# Altium PCB Bing Bong.PcbDoc
Units mil, origin at the board's own origin, x right, y up, seen from the top; angles counter-clockwise.
Board outline 6000 x 4000 mil, 2 copper layers (Top Layer, Bottom Layer); 143 components, 92 nets, 472 pads, 2 vias.
Unrouted connection lines stored in the file: 332.
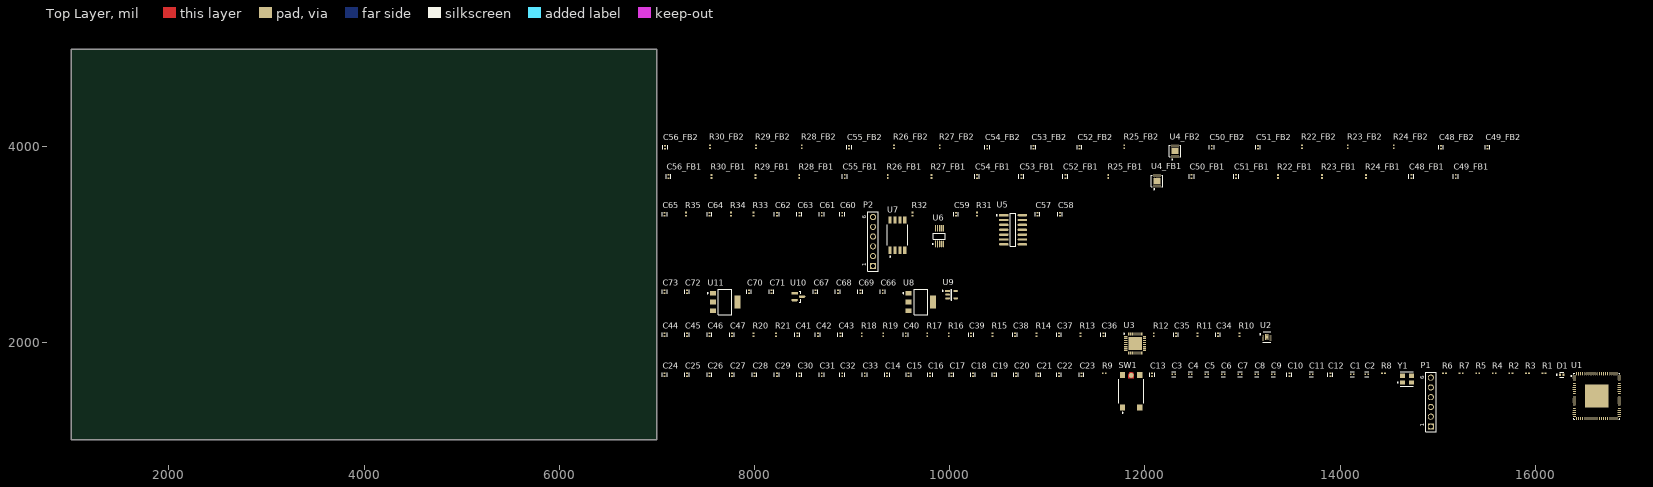
[diagram p0: Top Layer view]
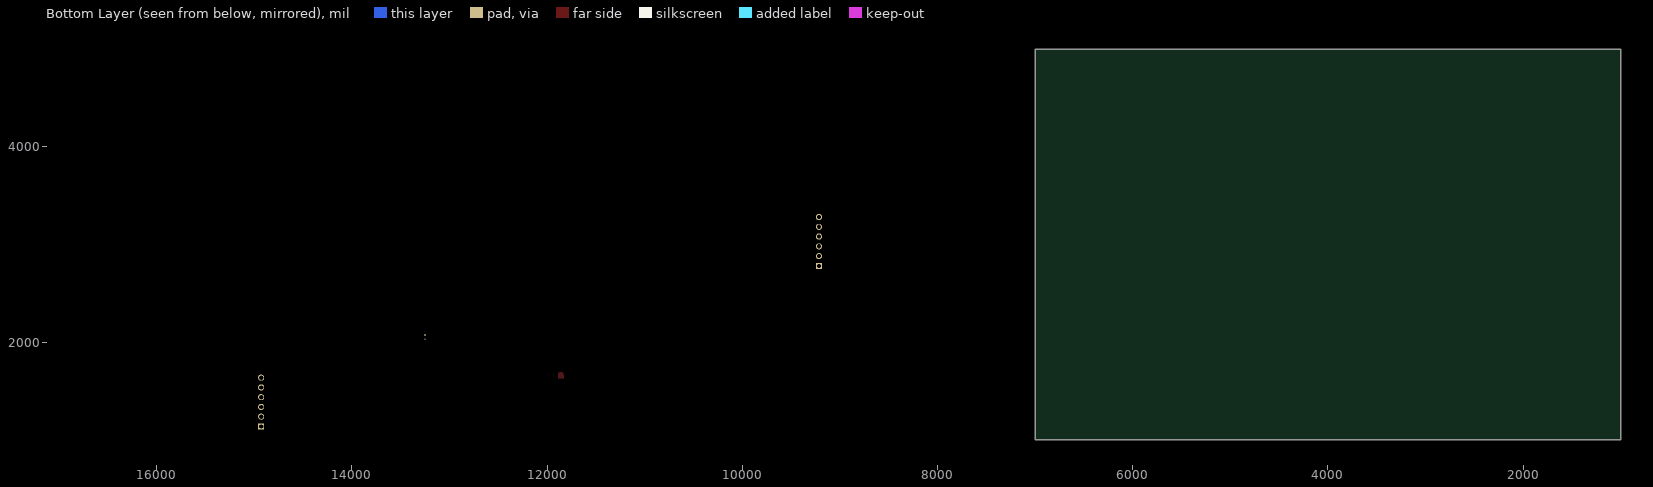
[diagram p1: Bottom Layer view, seen from below]

## Layer stack, top to bottom
Top Solder: solder mask 0.4, Solder Resist, Dk 3.5
Top Layer: signal copper 1.4
Dielectric 1: dielectric 12.6, FR-4, Dk 4.8
Bottom Layer: signal copper 1.4
Bottom Solder: solder mask 0.4, Solder Resist, Dk 3.5

## Board outline
1000,1000 7000,1000 7000,5000 1000,5000

## Design rules (kind name [scope] priority, off if disabled: settings)
Clearance [All] p1: gap=10 ignorepadtopadclearanceinfootprint=FALSE except(0: Arc-Hole Track-Hole SMDPad-Hole THPad-Hole Via-Hole Fill-Hole Poly-Hole Region-Hole Text-Hole)
PolygonConnect [All] p1: connectstyle=Relief reliefconductorwidth=10 reliefentries=4 polygonreliefangle="90 Angle" airgapwidth=10
RoomDefinition Designator_5 [InComponentClass('Designator')] p1: confinementstyle=ConfineIn formatcopy=TRUE lockcomponents=FALSE outline 0,0 2000,0 2000,1000 0,1000
RoomDefinition Designator_4 [InComponentClass('Designator')] p2: confinementstyle=ConfineIn formatcopy=TRUE lockcomponents=FALSE outline 0,0 2000,0 2000,1000 0,1000
RoomDefinition Designator [InComponentClass('Designator')] p3: confinementstyle=ConfineIn formatcopy=TRUE lockcomponents=FALSE outline 0,0 2000,0 2000,1000 0,1000
RoomDefinition Designator [InComponentClass('Designator')] p4: confinementstyle=ConfineIn formatcopy=TRUE lockcomponents=FALSE outline 0,0 2000,0 2000,1000 0,1000
RoomDefinition FB2 [InComponentClass('FB2')] p5: confinementstyle=ConfineIn formatcopy=TRUE lockcomponents=FALSE outline 7045,3855 15910,3855 15910,4150 7045,4150
RoomDefinition FB1 [InComponentClass('FB1')] p6: confinementstyle=ConfineIn formatcopy=TRUE lockcomponents=FALSE outline 7080,3550.75 15565,3550.75 15565,3845.75 7080,3845.75
RoutingVias [All] p1: holewidth=28 width=50 viastyle="Through Hole" minholewidth=28 minwidth=50 maxholewidth=28 maxwidth=50
SolderMaskExpansion [All] p1: expansion=4 istentingtop=FALSE
Width [All] p1: maxlimit=10 minlimit=10 preferedwidth=10
30 further rules are at their usual default settings.

## Classes and differential pairs
channel class "Filters n Buffers": FB1 FB2
net class "IN- [1..2]": "IN- 1" "IN- 2"
net class "Au In [1..2]": "Au In 1" "Au In 2"
component class FB2: C48_FB2 C49_FB2 C50_FB2 C51_FB2 C52_FB2 C53_FB2 C54_FB2 C55_FB2 C56_FB2 R22_FB2 R23_FB2 R24_FB2 R25_FB2 R26_FB2 R27_FB2 R28_FB2 R29_FB2 R30_FB2 U4_FB2
component class FB1: C48_FB1 C49_FB1 C50_FB1 C51_FB1 C52_FB1 C53_FB1 C54_FB1 C55_FB1 C56_FB1 R22_FB1 R23_FB1 R24_FB1 R25_FB1 R26_FB1 R27_FB1 R28_FB1 R29_FB1 R30_FB1 U4_FB1
component class Designator: C57 C58 C59 C60 C61 C62 C63 C64 C65 P2 R31 R32 R33 R34 R35 U5 U6 U7

## Components (designator, comment, footprint, x,y, rotation, side; value= is the part's Value field where it differs from the comment)
C1 "18pF" FP-GRM15-MFG 14125,1670 r0 top value=0.10μF
C2 "18pF" FP-GRM15-MFG 14275,1670 r0 top value=0.10μF
C3 "1uF" FP-GRM15-MFG 12295,1670 r0 top value=0.10μF
C4 "1uF" FP-GRM15-MFG 12465,1670 r0 top value=0.10μF
C5 "1uF" FP-GRM15-MFG 12635,1670 r0 top value=0.10μF
C6 "1uF" FP-GRM15-MFG 12805,1670 r0 top value=0.10μF
C7 "1uF" FP-GRM15-MFG 12975,1670 r0 top value=0.10μF
C8 "1uF" FP-GRM15-MFG 13145,1670 r0 top value=0.10μF
C9 "1uF" FP-GRM15-MFG 13315,1670 r0 top value=0.10μF
C10 "1uF" FP-GRM15-MFG 13480,1665 r90 top value=0.10μF
C11 "1uF" FP-GRM15-MFG 13705,1670 r0 top value=0.10μF
C12 "1uF" FP-GRM15-MFG 13900,1665 r90 top value=0.10μF
C13 "47pF" FP-GRM15-MFG 12075,1665 r90 top value=0.10μF
C14 "0.1uF" FP-GRM15-MFG 9360,1665 r90 top value=0.10μF
C15 "0.1uF" FP-GRM15-MFG 9580,1665 r90 top value=0.10μF
C16 "0.1uF" FP-GRM15-MFG 9800,1665 r90 top value=0.10μF
C17 "0.1uF" FP-GRM15-MFG 10020,1665 r90 top value=0.10μF
C18 "0.1uF" FP-GRM15-MFG 10240,1665 r90 top value=0.10μF
C19 "0.1uF" FP-GRM15-MFG 10460,1665 r90 top value=0.10μF
C20 "0.1uF" FP-GRM15-MFG 10680,1665 r90 top value=0.10μF
C21 "0.1uF" FP-GRM15-MFG 10910,1665 r90 top value=0.10μF
C22 "0.1uF" FP-GRM15-MFG 11120,1665 r90 top value=0.10μF
C23 "0.1uF" FP-GRM15-MFG 11350,1665 r90 top value=0.10μF
C24 "0.1uF" FP-GRM15-MFG 7080,1665 r90 top value=0.10μF
C25 "0.1uF" FP-GRM15-MFG 7310,1665 r90 top value=0.10μF
C26 "0.1uF" FP-GRM15-MFG 7540,1665 r90 top value=0.10μF
C27 "0.1uF" FP-GRM15-MFG 7770,1665 r90 top value=0.10μF
C28 "0.1uF" FP-GRM15-MFG 8000,1665 r90 top value=0.10μF
C29 "1uF" FP-GRM15-MFG 8230,1665 r90 top value=0.10μF
C30 "1uF" FP-GRM15-MFG 8460,1665 r90 top value=0.10μF
C31 "1uF" FP-GRM15-MFG 8690,1665 r90 top value=0.10μF
C32 "1uF" FP-GRM15-MFG 8900,1665 r90 top value=0.10μF
C33 "1uF" FP-GRM15-MFG 9130,1665 r90 top value=0.10μF
C34 "1nF" FP-GRM15-MFG 12750,2075 r90 top value=0.10μF
C35 "10uF" FP-GRM15-MFG 12320,2075 r90 top value=0.10μF
C36 "10uF" FP-GRM15-MFG 11575,2075 r90 top value=0.10μF
C37 "1nF" FP-GRM15-MFG 11120,2075 r90 top value=0.10μF
C38 "1nF" FP-GRM15-MFG 10670,2075 r90 top value=0.10μF
C39 "10uF" FP-GRM15-MFG 10220,2075 r90 top value=0.10μF
C40 "1nF" FP-GRM15-MFG 9550,2075 r90 top value=0.10μF
C41 "0.1uF" FP-GRM15-MFG 8440,2075 r90 top value=0.10μF
C42 "0.1uF" FP-GRM15-MFG 8650,2075 r90 top value=0.10μF
C43 "0.1uF" FP-GRM15-MFG 8880,2075 r90 top value=0.10μF
C44 "10uF" FP-GRM15-MFG 7080,2075 r90 top value=0.10μF
C45 "10uF" FP-GRM15-MFG 7310,2075 r90 top value=0.10μF
C46 "0.1uF" FP-GRM15-MFG 7540,2075 r90 top value=0.10μF
C47 "10uF" FP-GRM15-MFG 7770,2075 r90 top value=0.10μF
C48_FB1 "1uF" FP-GRM15-MFG 14730,3695.75 r90 top value=0.10μF (schematic designator C48)
C48_FB2 "1uF" FP-GRM15-MFG 15035,3995 r90 top value=0.10μF (schematic designator C48)
C49_FB1 "0.1uF" FP-GRM15-MFG 15185,3695.75 r90 top value=0.10μF (schematic designator C49)
C49_FB2 "0.1uF" FP-GRM15-MFG 15510,3995 r90 top value=0.10μF (schematic designator C49)
C50_FB1 "10uF" FP-GRM15-MFG 12480,3695.75 r90 top value=0.10μF (schematic designator C50)
C50_FB2 "10uF" FP-GRM15-MFG 12685,3995 r90 top value=0.10μF (schematic designator C50)
C51_FB1 "DNP!" FP-GRM15-MFG 12935,3695.75 r90 top value=0.10μF (schematic designator C51)
C51_FB2 "DNP!" FP-GRM15-MFG 13160,3995 r90 top value=0.10μF (schematic designator C51)
C52_FB1 "1nF" FP-GRM15-MFG 11185,3695.75 r90 top value=0.10μF (schematic designator C52)
C52_FB2 "1nF" FP-GRM15-MFG 11330,3995 r90 top value=0.10μF (schematic designator C52)
C53_FB1 "6.8nF" FP-GRM15-MFG 10735,3695.75 r90 top value=0.10μF (schematic designator C53)
C53_FB2 "6.8nF" FP-GRM15-MFG 10860,3995 r90 top value=0.10μF (schematic designator C53)
C54_FB1 "10uF" FP-GRM15-MFG 10280,3695.75 r90 top value=0.10μF (schematic designator C54)
C54_FB2 "10uF" FP-GRM15-MFG 10385,3995 r90 top value=0.10μF (schematic designator C54)
C55_FB1 "1nF" FP-GRM15-MFG 8925,3695.75 r90 top value=0.10μF (schematic designator C55)
C55_FB2 "1nF" FP-GRM15-MFG 8970,3995 r90 top value=0.10μF (schematic designator C55)
C56_FB1 "DNP!" FP-GRM15-MFG 7120,3695.75 r90 top value=0.10μF (schematic designator C56)
C56_FB2 "DNP!" FP-GRM15-MFG 7085,3995 r90 top value=0.10μF (schematic designator C56)
C57 "0.1uF" FP-GRM15-MFG 10900,3310 r90 top value=0.10μF
C58 "1uF" FP-GRM15-MFG 11130,3310 r90 top value=0.10μF
C59 "0.1uF" FP-GRM15-MFG 10065,3310 r90 top value=0.10μF
C60 "0.1uF" FP-GRM15-MFG 8900,3310 r90 top value=0.10μF
C61 "47pF" FP-GRM15-MFG 8690,3310 r90 top value=0.10μF
C62 "0.1uF" FP-GRM15-MFG 8230,3310 r90 top value=0.10μF
C63 "1uF" FP-GRM15-MFG 8460,3310 r90 top value=0.10μF
C64 "0.1uF" FP-GRM15-MFG 7540,3310 r90 top value=0.10μF
C65 "0.1uF" FP-GRM15-MFG 7080,3310 r90 top value=0.10μF
C66 "0.47uF" FP-GRM15-MFG 9315,2515 r90 top value=0.10μF
C67 "0.47uF" FP-GRM15-MFG 8625,2515 r90 top value=0.10μF
C68 "0.47uF" FP-GRM15-MFG 8855,2515 r90 top value=0.10μF
C69 "0.47uF" FP-GRM15-MFG 9085,2515 r90 top value=0.10μF
C70 "0.47uF" FP-GRM15-MFG 7945,2515 r90 top value=0.10μF
C71 "0.47uF" FP-GRM15-MFG 8175,2515 r90 top value=0.10μF
C72 "0.47uF" FP-GRM15-MFG 7310,2515 r90 top value=0.10μF
C73 "0.47uF" FP-GRM15-MFG 7080,2515 r90 top value=0.10μF
D1 "SML-P11UTT86" FP-SML-P11UTT86-MFG 16270,1665 r0 top
P1 "61300611121" 61300611121 14930,1385 r90 top
P2 "61300611121" 61300611121 9215,3030 r90 top
R1 "2K2" RESC1005X40X25LL05T05 16090,1680 r0 top
R2 "0R" RESC1005X40X25LL05T05 15750,1680 r0 top
R3 "DNP!" RESC1005X40X25LL05T05 15920,1680 r0 top
R4 "2K2" RESC1005X40X25LL05T05 15580,1680 r0 top
R5 "2K2" RESC1005X40X25LL05T05 15410,1680 r0 top
R6 "DNP!" RESC1005X40X25LL05T05 15070,1680 r0 top
R7 "0R" RESC1005X40X25LL05T05 15240,1680 r0 top
R8 "2K" RESC1005X40X25LL05T05 14445,1680 r0 top
R9 "10K" RESC1005X40X25LL05T05 11585,1680 r0 top
R10 "5K" RESC1005X40X25LL05T05 12970,2075 r90 top
R11 "10K" RESC1005X40X25LL05T05 12540,2075 r90 top
R12 "10K" RESC1005X40X25LL05T05 12090,2075 r90 top
R13 "5K" RESC1005X40X25LL05T05 11340,2075 r90 top
R14 "5K" RESC1005X40X25LL05T05 10890,2075 r90 top
R15 "10K" RESC1005X40X25LL05T05 10440,2075 r90 top
R16 "10K" RESC1005X40X25LL05T05 9990,2075 r90 top
R17 "5K" RESC1005X40X25LL05T05 9770,2075 r90 top
R18 "0R" RESC1005X40X25LL05T05 9100,2075 r90 top
R19 "0R" RESC1005X40X25LL05T05 9320,2075 r90 top
R20 "0R" RESC1005X40X25LL05T05 7990,2075 r90 top
R21 "0R" RESC1005X40X25LL05T05 8220,2075 r90 top
R22_FB1 "1K" RESC1005X40X25LL05T05 13365,3695.75 r90 top (schematic designator R22)
R22_FB2 "1K" RESC1005X40X25LL05T05 13610,4000 r90 top (schematic designator R22)
R23_FB1 "2K" RESC1005X40X25LL05T05 13815,3695.75 r90 top (schematic designator R23)
R23_FB2 "2K" RESC1005X40X25LL05T05 14080,4000 r90 top (schematic designator R23)
R24_FB1 "0R" RESC1005X40X25LL05T05 14265,3695.75 r90 top (schematic designator R24)
R24_FB2 "0R" RESC1005X40X25LL05T05 14550,4000 r90 top (schematic designator R24)
R25_FB1 "2K" RESC1005X40X25LL05T05 11625,3695.75 r90 top (schematic designator R25)
R25_FB2 "2K" RESC1005X40X25LL05T05 11790,4000 r90 top (schematic designator R25)
R26_FB1 "1K" RESC1005X40X25LL05T05 9365,3695.75 r90 top (schematic designator R26)
R26_FB2 "1K" RESC1005X40X25LL05T05 9430,4000 r90 top (schematic designator R26)
R27_FB1 "2K" RESC1005X40X25LL05T05 9815,3695.75 r90 top (schematic designator R27)
R27_FB2 "2K" RESC1005X40X25LL05T05 9900,4000 r90 top (schematic designator R27)
R28_FB1 "2K" RESC1005X40X25LL05T05 8460,3695.75 r90 top (schematic designator R28)
R28_FB2 "2K" RESC1005X40X25LL05T05 8485,4000 r90 top (schematic designator R28)
R29_FB1 "10K" RESC1005X40X25LL05T05 8010,3695.75 r90 top (schematic designator R29)
R29_FB2 "10K" RESC1005X40X25LL05T05 8015,4000 r90 top (schematic designator R29)
R30_FB1 "0R" RESC1005X40X25LL05T05 7560,3695.75 r90 top (schematic designator R30)
R30_FB2 "0R" RESC1005X40X25LL05T05 7545,4000 r90 top (schematic designator R30)
R31 "100R" RESC1005X40X25LL05T05 10280,3310 r90 top
R32 "100R" RESC1005X40X25LL05T05 9620,3310 r90 top
R33 "100R" RESC1005X40X25LL05T05 7990,3310 r90 top
R34 "10K" RESC1005X40X25LL05T05 7760,3310 r90 top
R35 "100R" RESC1005X40X25LL05T05 7300,3310 r90 top
SW1 "FSM1LP" FP-FSM1LP-MFG 11860,1495 r90 top
U1 "ADSP-BF706" FP-CP-88-8-IPC_C 16630,1445 r0 top
U2 "OPA2991IDSGR" FP-DSG0008A-MFG 13250,2050 r0 top
U3 "ADAU1761" LFCSP-32 11900,1985 r0 top
U4_FB1 "AD8137YCPZ-REEL7" FP-CP-8-13-IPC_C 12125,3650.75 r90 top (schematic designator U4)
U4_FB2 "AD8137YCPZ-REEL7" FP-CP-8-13-IPC_C 12310,3955 r90 top (schematic designator U4)
U5 "LM2902DR" FP-D0014A-IPC_A 10650,3150 r0 top
U6 "ADC084S021CIMM/NOPB" MUB10A_N 9895,3085 r90 top
U7 "W25Q32FVSSIG" FP-SS-MFG 9465,3095 r90 top
U8 "ZLDO1117QG33TA" FP-SOT223-MFG 9705,2410 r0 top
U9 "TLV73311PDBVT" FP-DBV0005A-IPC_C 10020,2485 r0 top
U10 "AP2120N-1.8TRG1" FP-SOT23-IPC_A 8450,2465 r0 top
U11 "ZLDO1117QG33TA" FP-SOT223-MFG 7700,2410 r0 top
Y1 "ABM8-25.000MHZ-B2-T" FP-ABM8-MFG 14685,1620 r0 top

## Footprints (in the part's own frame and the unit in brackets; to place one, negate y for a bottom-side part, rotate by r counter-clockwise, add the part's x,y. Pads: shape width x height; smd on the part's side, far side on the other; paste and mask are expansions set on the pad)
61300611121 [mm] "Pin Header, pitch 2.54 mm, THT, Vertical, single row, 6p"
  rect 1.6x1.6 hole 1.1: 1(-6.35,0)
  round 1.6 hole 1.1: 2(-3.81,0) 3(-1.27,0) 4(1.27,0) 5(3.81,0) 6(6.35,0)
  silkscreen extent -7.77,-1.35 7.77,1.35, body extent -7.62,-1.27 7.62,1.27, height 8.57
FP-ABM8-MFG [mm]
  rect 1.3x1.05 smd paste+0 mask+0: 1(-1.15,-0.875) 2(1.15,-0.875) 3(1.15,0.875) 4(-1.15,0.875)
  silkscreen extent -2.5,-1.88 1.7,1.88, body extent -1.9,-1.5 1.9,1.5, height 0.25
FP-CP-8-13-IPC_C [mm]
  rect 0.81x0.242 smd paste+0 mask+0: 1(-1.351,0.75)
  rrect100% 0.81x0.242 smd paste+0 mask+0: 2(-1.351,0.25) 3(-1.351,-0.25) 4(-1.351,-0.75) 5(1.351,-0.75) 6(1.351,-0.25) 7(1.351,0.25) 8(1.351,0.75)
  rect 1.55x1.84 smd paste-1000 mask+0: 9(0,0)
  silkscreen extent -2.28,-1.5 1.5,1.5, body extent -1.86,-1.6 1.86,1.6, height 0.25
FP-CP-88-8-IPC_C [mm]
  rect 0.81x0.222 smd paste+0 mask+0: 1(-5.851,5.25)
  rrect100% 0.81x0.222 smd paste+0 mask+0: 2(-5.851,4.75) 3(-5.851,4.25) 4(-5.851,3.75) 5(-5.851,3.25) 6(-5.851,2.75) 7(-5.851,2.25) 8(-5.851,1.75) 9(-5.851,1.25) 10(-5.851,0.75) 11(-5.851,0.25) 12(-5.851,-0.25) 13(-5.851,-0.75) 14(-5.851,-1.25) 15(-5.851,-1.75) 16(-5.851,-2.25) 17(-5.851,-2.75) 18(-5.851,-3.25) 19(-5.851,-3.75) 20(-5.851,-4.25) 21(-5.851,-4.75) 22(-5.851,-5.25) 45(5.851,-5.25) 46(5.851,-4.75) 47(5.851,-4.25) 48(5.851,-3.75) 49(5.851,-3.25) 50(5.851,-2.75) 51(5.851,-2.25) 52(5.851,-1.75) 53(5.851,-1.25) 54(5.851,-0.75) 55(5.851,-0.25) 56(5.851,0.25) 57(5.851,0.75) 58(5.851,1.25) 59(5.851,1.75) 60(5.851,2.25) 61(5.851,2.75) 62(5.851,3.25) 63(5.851,3.75) 64(5.851,4.25) 65(5.851,4.75) 66(5.851,5.25)
  rrect100% 0.222x0.81 smd paste+0 mask+0: 23(-5.25,-5.851) 24(-4.75,-5.851) 25(-4.25,-5.851) 26(-3.75,-5.851) 27(-3.25,-5.851) 28(-2.75,-5.851) 29(-2.25,-5.851) 30(-1.75,-5.851) 31(-1.25,-5.851) 32(-0.75,-5.851) 33(-0.25,-5.851) 34(0.25,-5.851) 35(0.75,-5.851) 36(1.25,-5.851) 37(1.75,-5.851) 38(2.25,-5.851) 39(2.75,-5.851) 40(3.25,-5.851) 41(3.75,-5.851) 42(4.25,-5.851) 43(4.75,-5.851) 44(5.25,-5.851) 67(5.25,5.851) 68(4.75,5.851) 69(4.25,5.851) 70(3.75,5.851) 71(3.25,5.851) 72(2.75,5.851) 73(2.25,5.851) 74(1.75,5.851) 75(1.25,5.851) 76(0.75,5.851) 77(0.25,5.851) 78(-0.25,5.851) 79(-0.75,5.851) 80(-1.25,5.851) 81(-1.75,5.851) 82(-2.25,5.851) 83(-2.75,5.851) 84(-3.25,5.851) 85(-3.75,5.851) 86(-4.25,5.851) 87(-4.75,5.851) 88(-5.25,5.851)
  rect 6x6 smd paste-1000 mask+0: 89(0,0)
  silkscreen extent -6.78,-6 6,6, body extent -6.36,-6.36 6.36,6.36, height 0.25
FP-D0014A-IPC_A [mil]
  rect 97.4x24.49 smd paste+0 mask+0: 1(-95.12,150)
  rrect100% 97.4x24.49 smd paste+0 mask+0: 2(-95.12,100) 3(-95.12,50) 4(-95.12,0) 5(-95.12,-50) 6(-95.12,-100) 7(-95.12,-150) 8(95.12,-150) 9(95.12,-100) 10(95.12,-50) 11(95.12,0) 12(95.12,50) 13(95.12,100) 14(95.12,150)
  silkscreen extent -172,-170 27,170, body extent -164,-190 164,190, height 10
FP-DBV0005A-IPC_C [mm]
  rect 1.205x0.532 smd paste+0 mask+0: 1(-1.05,0.95)
  rrect100% 1.205x0.532 smd paste+0 mask+0: 2(-1.05,0) 3(-1.05,-0.95) 4(1.05,-0.95) 5(1.05,0.95)
  silkscreen extent -2.45,-1.45 0.05,1.45, body extent -1.75,-1.55 1.75,1.55, height 0.25
FP-DSG0008A-MFG [mm]
  rrect40% 0.5x0.25 smd paste+0 mask+0: 1(-0.95,0.75) 2(-0.95,0.25) 3(-0.95,-0.25) 4(-0.95,-0.75) 5(0.95,-0.75) 6(0.95,-0.25) 7(0.95,0.25) 8(0.95,0.75)
  rrect11% 0.9x1.6 smd paste-1000 mask+0: 9(0,0)
  silkscreen extent -1.87,-1.39 1,1.4, body extent -1.3,-1.15 1.3,1.15, height 0.25
FP-FSM1LP-MFG [mm]
  rect 1.6x1.395 smd paste+0 mask+0: 1(-4.205,2.248) 2(4.205,2.248) 3(-4.205,-2.248) 4(4.205,-2.248)
  round 1.26 smd paste+0 mask+0: 5(4.139,0)
  Top Layer region: 3.405,0.7 4.307,0.7 4.574,0.647 4.801,0.496 4.952,0.269 5.005,0.002 5.005,0.002 5.005,-0.002 4.952,-0.269 4.801,-0.496 4.574,-0.647 4.307,-0.7 4.307,-0.7 3.405,-0.7
  silkscreen extent -5.72,-3.25 3.15,3.25, body extent -5.1,-3.35 5.11,3.35, height 0.25
FP-GRM15-MFG [mm]
  rect 0.4x0.5 smd paste+0 mask+0: 1(-0.4,0) 2(0.4,0)
  silkscreen extent -0.53,-0.63 0.53,0.63, body extent -0.7,-0.38 0.7,0.38, height 0.25
FP-SML-P11UTT86-MFG [mm]
  rect 0.5x0.6 smd paste+0 mask+0: 1(-0.45,0) 2(0.45,0)
  silkscreen extent -1.37,-0.67 0.53,0.67, body extent -0.8,-0.43 0.8,0.43, height 0.25
FP-SOT23-IPC_A [mm]
  rect 1.659x0.627 smd paste+0 mask+0: 1(-0.977,0.915)
  rrect100% 1.659x0.627 smd paste+0 mask+0: 2(-0.977,-0.915) 3(0.977,0)
  silkscreen extent 0.23,-1.45 0.65,1.45, body extent -2.31,-1.95 2.31,1.95, height 0.25
FP-SOT223-MFG [mm]
  rect 1.6x1.2 smd paste+0 mask+0: 1(-3.2,2.3) 2(-3.2,0) 3(-3.2,-2.3)
  rect 1.6x3.3 smd paste+0 mask+0: 4(3.2,0)
  silkscreen extent -4.67,-3.27 1.78,3.27, body extent -4.1,-3.37 4.1,3.37, height 0.25
FP-SS-MFG [mm]
  rect 1.9x0.8 smd paste-1000 mask+0: 1(-3.95,1.905) 2(-3.95,0.635) 3(-3.95,-0.635) 4(-3.95,-1.905) 5(3.95,-1.905) 6(3.95,-0.635) 7(3.95,0.635) 8(3.95,1.905)
  silkscreen extent -5.71,-2.69 2.69,2.69, body extent -5,-2.79 5,2.79, height 0.25
LFCSP-32 [mm] "SIGMADSP CODEC"
  rect 0.85x0.3 smd: 1(-2.45,1.75) 2(-2.45,1.25) 3(-2.45,0.75) 4(-2.45,0.25) 5(-2.45,-0.25) 6(-2.45,-0.75) 7(-2.45,-1.25) 8(-2.45,-1.75) 17(2.45,-1.75) 18(2.45,-1.25) 19(2.45,-0.75) 20(2.45,-0.25) 21(2.45,0.25) 22(2.45,0.75) 23(2.45,1.25) 24(2.45,1.75)
  rect 0.3x0.85 smd: 9(-1.75,-2.45) 10(-1.25,-2.45) 11(-0.75,-2.45) 12(-0.25,-2.45) 13(0.25,-2.45) 14(0.75,-2.45) 15(1.25,-2.45) 16(1.75,-2.45) 25(1.75,2.45) 26(1.25,2.45) 27(0.75,2.45) 28(0.25,2.45) 29(-0.25,2.45) 30(-0.75,2.45) 31(-1.25,2.45) 32(-1.75,2.45)
  rrect10% 3.5x3.5 smd: 33(0,0)
  silkscreen extent -3,2.38 -2.75,2.62, body extent -2.55,-2.55 2.55,2.55, height 1
MUB10A_N [mm] "TSSOP, 10-Leads, Body 3x3mm, Pitch 0.5mm, IPC Medium Density"
  oval 1.7x0.3 smd: 1(-2.05,1) 2(-2.05,0.5) 3(-2.05,0) 4(-2.05,-0.5) 5(-2.05,-1) 6(2.05,-1) 7(2.05,-0.5) 8(2.05,0) 9(2.05,0.5) 10(2.05,1)
  silkscreen extent -2.17,-1.55 0.8,1.82, body extent -1.55,-1.55 1.55,1.55, height 1.09
RESC1005X40X25LL05T05 [mm] "Chip Resistor, 2-Leads, Body 1.05x0.55mm, IPC High Density"
  rect 0.45x0.45 smd: 1(-0.4,0) 2(0.4,0)
  body extent -0.53,-0.28 0.53,0.28, height 0.4

## Part data
C1 C2 C3 C4 C5 C6 C7 C8 C9 C10 C11 C12 C13 C14 C15 C16 C17 C18 C19 C20 C21 C22 C23 C24 C25 C26 C27 C28 C29 C30 C31 C32 C33 C34 C35 C36 C37 C38 C39 C40 C41 C42 C43 C44 C45 C46 C47 C48_FB1 C48_FB2 C49_FB1 C49_FB2 C50_FB1 C50_FB2 C51_FB1 C51_FB2 C52_FB1 C52_FB2 C53_FB1 C53_FB2 C54_FB1 C54_FB2 C55_FB1 C55_FB2 C56_FB1 C56_FB2 C57 C58 C59 C60 C61 C62 C63 C64 C65 C66 C67 C68 C69 C70 C71 C72 C73: library part CMP-2100-03641-2, "CAP CER 0.1UF 16V X7R 0402", Capacitance=0.10μF, Manufacturer=Murata, Manufacturer Part Number=GRM155R71C104KA88D, Package=GRM15, Temperature="-55°C to +125°C", Temperature Characteristic=X7R, Temperature Range High=+125°C, Temperature Range Low=-55°C, Tolerance=10%, Voltage Rating=16Vdc, Category=Cap, ComponentLink2Description=Datasheet, ComponentLink2URL=https://search.murata.co.jp/Ceramy/image/img/A01X/G101/ENG/GRM155R71H471KA01-01A.pdf, Device Class L1="Passive Components", Device Class L2=Capacitors, Device Class L3="Ceramic Capacitors", Digikey Description="CAP CER 0.1UF 16V X7R 0402", Height=0.55mm, Ipc Land Pattern Name=CAPC10050X219, Lead Free=yes, Material=Ceramic, Mouser Description="0402 0.1 uF 16V ±10 % Tolerance X7R SMT Multilayer Ceramic Capacitor", Octopart=https://octopart.com/grm155r71c104ka88d-murata-196880, RoHS=TRUE, Standoff Height=0mm
D1: library part CMP-08952-000028-1, "LED RED CLEAR 1006 SMD", Case Code (Imperial)=0402, Case Code (Metric)=1005, Color=Red, Forward Current=20mA, Forward Voltage=1.8V, Lens Color=Colorless, Max Operating Temperature=85°C, Min Operating Temperature=-40°C, Package Quantity=1, Test Current=1mA, Case/Package=0402, Dominant Wavelength=621nm, Height=0.25mm, Illumination Color=Red, Lead Free="Lead Free", Length=1mm, Lens Style=Square, Lens Transparency=Clear, Luminous Intensity=5.5mcd, Mount="Surface Mount", Number of LEDs=1, Number of Pins=2, Packaging="Tape and Reel", Radiation Hardening=No, REACH SVHC="No SVHC", RoHS Compliant=Yes, Series=PicoLED™, Viewing Angle=150°, Wavelength=621nm, Width=0.6mm
P1 P2: library part CMP-1502-01070-1, "THT Vertical Pin Header WR-PHD, Pitch 2.54 mm, Single Row, 6 pins", Contact Resistance=20mOhm, Manufacturer="Wurth Elektronik", Operating Temperature=-40to105degC, Rated Current=3A, Withstanding Voltage=500VAC, Working Voltage=250VAC, Datasheet URL=https://katalog.we-online.de/em/datasheet/6130xx11121.pdf, Gender=Male, Manufacturer URL=http://www.we-online.de, Mounting Technology=THT, Orientation=Vertical, Package Reference=61300611121, Packaging=Bag, Part Number=61300611121, Pin Number=6, Pitch=2.54mm, Publisher=WurthElektronik, Row Number=Single
R1 R2 R3 R4 R5 R6 R7 R8 R9 R10 R11 R12 R13 R14 R15 R16 R17 R18 R19 R20 R21 R22_FB1 R22_FB2 R23_FB1 R23_FB2 R24_FB1 R24_FB2 R25_FB1 R25_FB2 R26_FB1 R26_FB2 R27_FB1 R27_FB2 R28_FB1 R28_FB2 R29_FB1 R29_FB2 R30_FB1 R30_FB2 R31 R32 R33 R34 R35: library part CMP-2000-07451-1, "Chip Resistor, 0 Ohm, 0.1 W, -55 to 155 degC, 0402 (1005 Metric), RoHS, Tape and Reel", Case Code (Imperial)=0402, Case Code (Metric)=1005, Manufacturer=Panasonic, Max Operating Temperature=155degC, Max Power Dissipation=100mW, Min Operating Temperature=-55degC, Package Description="2-Pin Surface Mount Device, Body 1 x 0.5 mm", Package Quantity=1, Package Reference=402, Resistance=0mOhm, Temperature Coefficient=600ppm/��C, Tolerance=5%, Voltage Rating=50V, Case/Package=0402, Composition=ThickFilm, Contact Plating=Tin, Datasheet URL=https://industrial.panasonic.com/cdbs/www-data/pdf/RDA0000/AOA0000C301.pdf, Datasheet Version=03/2015, Depth=0.5mm, Height=0.35mm, Lead Free=LeadFree, Length=1mm, Manufacturer URL=http://www.panasonic.com/, Military Standard=Not, Mount=SurfaceMount, Mounting Technology=SurfaceMount, Number of Terminations=2, Packaging=TapeandReel, Power Rating=100mW, Radiation Hardening=No, REACH SVHC=NoSVHC, RoHSCompliant=True, Termination=SMD/SMT, Voltage Rating (DC)=50V, Width=0.02inch
SW1: library part CMP-03402-000015-1, "SWITCH TACTILE SPST-NO 0.05A 24V", Actuator Color=Black, Contact Current Rating=50mA, Contact Resistance=100mR, Max Operating Temperature=85°C, Max Voltage Rating (DC)=12V, Min Operating Temperature=-35°C, Operating Force=1.57N, Package Quantity=2000, Actuator Length=0.01inch, Actuator Material=Polyphthalamide, Actuator Type=Standard, Contact Material="Copper Alloy", Contact Plating=Silver, Current Rating=50mA, Depth=8mm, Electrical Life=100000Cycles, ELV=Compliant, Illumination Type=Non-Illuminated, Lead Free="Lead Free", Length=6.19mm, Max Current Rating=50mA, Mechanical Life=100000Cycles, Mount="Surface Mount", Orientation=Straight, Packaging="Loose Piece", REACH SVHC="No SVHC", RoHS Compliant=Yes, Series=FSM1LP, Switch Function=Off-Mom, Switch Travel=0.25mm, Termination="Gull Wing", Throw Configuration=SPST, Type=Switch, Voltage Rating (DC)=12V
U1: library part CMP-09089-000022-1, "IC DSP LP 128KB L2SR 88LFCSP", Frequency=200MHz, Max Operating Temperature=85°C, Min Operating Temperature=-40°C, Interface=I2C, Lead Free="Contains Lead", Max Frequency=200MHz, Memory Size=512KB, Mount="Surface Mount", Number of Pins=88, Packaging=Tray, RAM Size=128KB, RoHS Compliant=Yes
U2: library part CMP-04895-000388-1, "IC OPAMP GP 2 CIRCUIT", RoHS Compliant=Yes
U3: "Interface - CODECs Low Power Codec w/Sigma DSP"
U4_FB1 U4_FB2: library part CMP-09116-000220-1, "IC OPAMP DIFF 1 CIRCUIT 8LFCSP", Case/Package="LFCSP EP", Input Bias Current=900nA, Input Offset Voltage (Vos)=2.7mV, Input Resistance=800kR, Max Dual Supply Voltage=6V, Max Operating Temperature=125°C, Max Supply Current=245uA, Max Supply Voltage=12V, Min Dual Supply Voltage=1.35V, Min Operating Temperature=-40°C, Min Supply Voltage=2.7V, Nominal Supply Current=3.2mA, Operating Supply Current=3.6mA, Output Current per Channel=20mA, Package Quantity=1, Power Supply Rejection Ratio (PSRR)=79dB, Voltage Gain=89dB, -3db Bandwidth=110MHz, Amplifier Type=DIFFERENTIAL, Bandwidth=110MHz, Common Mode Rejection Ratio=66dB, Gain Bandwidth Product=110MHz, Height=0.8mm, Lead Free="Contains Lead", Length=3.1mm, Mount="Surface Mount", Number of Amplifiers=1, Number of Bits=12, Number of Channels=1, Number of Circuits=1, Number of Elements=1, Number of Pins=8, Packaging="Tape and Reel", Radiation Hardening=No, REACH SVHC="No SVHC", RoHS Compliant=Yes, Series=-, Settling Time=100ns, Slew Rate=450V/µs, Supply Current=3.2mA, Width=3.1mm
U5: library part CMP-04895-000441-1, "IC OPAMP GP 4 CIRCUIT 14SOIC", Case/Package=SOIC, Dual Supply Voltage=9V, Input Bias Current=250nA, Input Offset Voltage (Vos)=7mV, Max Dual Supply Voltage=13V, Max Operating Temperature=125°C, Max Supply Voltage=26V, Min Dual Supply Voltage=1.5V, Min Operating Temperature=-40°C, Min Supply Voltage=3V, Nominal Supply Current=3mA, Operating Supply Current=1.4mA, Output Current=30mA, Output Current per Channel=60mA, Package Quantity=1, Power Supply Rejection Ratio (PSRR)=50dB, Voltage Gain=100dB, Bandwidth=1.2MHz, Common Mode Rejection Ratio=50dB, Contact Plating=Tin, Gain Bandwidth Product=1.2MHz, Height=1.58mm, Lead Free="Lead Free", Length=8.65mm, Mount="Surface Mount", Number of Amplifiers=4, Number of Channels=4, Number of Circuits=4, Number of Elements=4, Number of Pins=14, Operating Supply Voltage=13V, Packaging="Tape and Reel", Radiation Hardening=No, REACH SVHC="No SVHC", Slew Rate=0.5V/µs, Unity Gain Bandwidth Product=1.2MHz, Width=3.91mm
U6: library part CMP-0054-00454-2, "4 Channel, 50 kSPS to 200 kSPS, 8-Bit A/D Converter, 10-pin Mini SOIC, Pb-Free", Manufacturer="National Semiconductor", PackageTopMarking=ZXTT*X19C, PowerWise=Y, Code_JEDEC=MO-187-BA, ComponentLink1Description="ADC084S021 Datasheet", ComponentLink1URL=http://www.national.com/ds/AD/ADC084S021.pdf, ComponentLink2Description="ADC084S021 Web Page", ComponentLink2URL=http://www.national.com/pf/AD/ADC084S021.html, ComponentLink3Description="MUB10A Package Page", ComponentLink3URL=http://www.national.com/packaging/folders/mub10a.html, CompType="ADC IC", DatasheetVersion=Aug-2008, PackageDescription="Mini-SO, Molded, .118 x .118 x .034in Body, 10 Lead, .0197in Pitch", PackageReference=MUB10A, PackageVersion="revB, Jul-2003", PinCount=10, RevisionNote="Component URLs added", RoHS=Y
U7: library part CMP-2000-05006-2, "IC FLASH 32M SPI 104MHZ 8SOIC", Ambient Temperature Range High=+85°C, Ambient Temperature Range Low=-40°C, Frequency=104MHz, Manufacturer=Winbond, Max Supply Voltage=3.6V, Min Supply Voltage=2.7V, Nominal Supply Current=8-20mA, Package=SS, Temperature="-40°C to +85°C", Access Time=7ns, Automotive=No, Category=IC, ComponentLink2Description=Datasheet, ComponentLink2URL=https://www.winbond.com/resource-files/w25q32fv%20revj%2006032016.pdf, Device Class L1="Integrated Circuits (ICs)", Device Class L2=Memory, Device Class L3=Flash, Digikey Description="IC FLASH 32M SPI 104MHZ 8SOIC", Footprint Url=http://www.winbond.com/resource-files/an0000009%20spiflash%20pcb%20layout%20guideline%20v2.0%2009252017.pdf?__locale=en, Height=2.16mm, Interface=SPI,Other, Ipc Land Pattern Name=SOIC127P790X195-8, Lead Free=Yes, Manufacturer Part Number=W25Q32FVSSIG, Memory Size=32Mbits, Memory Type=FLASH, Obsolete Part=true, Octopart=https://octopart.com/w25q32fvssig-winbond-23896462, RoHS=TRUE, Standoff Height=0.05mm, Temperature Range High=+85°C, Temperature Range Low=-40°C
U8 U11: library part CMP-12756-000030-1, "IC REG LINEAR 3.3V 1A SOT223-3", Case/Package=SOT-223, Dropout Voltage=1.11V, Max Input Voltage=18V, Max Operating Temperature=125°C, Max Output Current=1A, Max Power Dissipation=15W, Min Current Limit=1.1A, Min Input Voltage=2.7V, Min Operating Temperature=-40°C, Min Output Voltage=3.3V, Output Voltage Accuracy=2%, Package Quantity=1000, Quiescent Current=10mA, Accuracy=2%, Height=1.7mm, Lead Free="Lead Free", Length=6.7mm, Mount="Surface Mount", Nominal Output Voltage=3.3V, Number of Outputs=1, Number of Pins=3, Number of Regulators=1, Output Current=1A, Output Type=Fixed, Output Voltage=3.3V, Packaging="Tape and Reel", Polarity=Positive, Power Dissipation=15W, Radiation Hardening=No, REACH SVHC="No SVHC", Reference Voltage=3.3V, Tolerance=2%, Weight=0.000282oz, Width=3.7mm
U9: library part CMP-04917-000285-1, "IC REG LINEAR 1.1V 300MA SOT23-5", Case/Package=SOT-23-5, Dropout Voltage=460mV, Max Input Voltage=5.5V, Max Operating Temperature=125°C, Max Output Current=300mA, Min Current Limit=360mA, Min Input Voltage=1.4V, Min Operating Temperature=-40°C, Nominal Output Voltage=1.1V, Operating Supply Current=34uA, Package Quantity=250, Power Supply Rejection Ratio (PSRR)=68dB, Quiescent Current=60uA, Accuracy=1%, Lead Free="Lead Free", Mount="Surface Mount", Number of Outputs=1, Number of Pins=5, Number of Regulators=1, Output Current=300mA, Output Type=Fixed, Output Voltage=1.1V, Packaging="Tape and Reel", Polarity=Positive, REACH SVHC="No SVHC", RoHS Compliant=Yes, Weight=0.000557oz
U10: library part CMP-12756-000031-1, "IC REG LINEAR 1.8V 150MA SOT23", Case/Package=SOT-23, Dropout Voltage=300mV, Max Input Voltage=6V, Max Operating Temperature=85°C, Max Output Current=150mA, Min Input Voltage=2V, Min Operating Temperature=-40°C, Operating Supply Current=25uA, Output Voltage=1.8V, Package Quantity=3000, Power Supply Rejection Ratio (PSRR)=65dB, Quiescent Current=50uA, Accuracy=2%, Height=1.1mm, Lead Free="Lead Free", Length=3mm, Mount="Surface Mount", Number of Outputs=1, Number of Pins=3, Number of Regulators=1, Output Current=150mA, Output Type=Fixed, Packaging="Tape and Reel", Polarity=Positive, Weight=0.000282oz, Width=1.4mm
Y1: library part CMP-27762-013668-1, "Crystal 25MHz ±20ppm 18pF SMD-4 3.2mm x 2.5mm", Case/Package=CSMD, ESR (Equivalent Series Resistance)=50R, Frequency=25MHz, Frequency Stability=50ppm, Frequency Tolerance=20ppm, Load Capacitance=18pF, Max Operating Temperature=70°C, Min Operating Temperature=-20°C, Operating Frequency="25 MHz", Package Quantity=1000, Resistor Type=Ceramic, Depth=2.5mm, Height=0.031inch, Lead Free="Lead Free", Length=3.2mm, Mount="Surface Mount", Number of Pins=4, Packaging="Tape and Reel", Radiation Hardening=No, REACH SVHC="No SVHC", Series=ABM8, Series Resistance=50R, Termination=SMD/SMT, Tolerance=20ppm, Width=0.098inch

## Via types
v1: diameter 19.68, hole 7.87, Top Layer to Bottom Layer, 2 vias

## Nets (pads, with @x,y where several pads share a name; then routed paths per layer and width w, separated by ;. In a path a pad name is that pad's centre, name@x,y a point inside that pad or via, vN(x,y) a via of type N, cw(c..) or ccw(c..) an arc to the next point about the centre after c; other vN are vias at no path point)
1V1: C24.2 C25.2 C26.2 C27.2 C28.2 C29.2 C30.2 C31.2 C32.2 C33.2 C69.2 U1.14 U1.30 U1.51 U1.61 U1.81 U9.5
1V8: C61.2 C71.2 U7.8 U10.2
3V3_FB1: C1.1 C2.1 C3.1 C4.1 C5.1 C6.1 C7.1 C8.1 C9.1 C10.1 C11.1 C12.1 C13.1 C14.1 C15.1 C16.1 C17.1 C18.1 C19.1 C20.1 C21.1 C22.1 C23.1 C24.1 C25.1 C26.1 C27.1 C28.1 C29.1 C30.1 C31.1 C32.1 C33.1 C36.1 C41.1 C42.1 C42.2 C43.1 C44.1 C45.1 C45.2 C46.1 C46.2 C47.1 C48_FB1.1 C48_FB1.2 C48_FB2.1 C48_FB2.2 C49_FB1.1 C49_FB1.2 C49_FB2.1 C49_FB2.2 C50_FB1.2 C50_FB2.2 C51_FB1.1 C51_FB2.1 C56_FB1.1 C56_FB2.1 C57.1 C57.2 C58.1 C58.2 C59.1 C60.1 C61.1 C62.1 C63.1 C64.1 C65.1 C66.1 C67.1 C68.1 C69.1 C70.1 C71.1 C72.1 C72.2 C73.1 P2.5 P2.6 R1.1 R6.1 R7.1 R20.1 R21.1 R29_FB1.2 R29_FB2.2 R34.1 SW1.3 SW1.4 SW1.5 U1.76 U1.89 U2.4 U2.8 U2.9 U3.8 U3.9 U3.22 U3.23 U3.25 U4_FB1.3 U4_FB1.6 U4_FB1.7 U4_FB1.9 U4_FB2.3 U4_FB2.6 U4_FB2.7 U4_FB2.9 U5.4 U5.11 U6.3 U7.4 U8.1 U9.2 U10.1 U11.1 U11.2 U11.4 Y1.2 Y1.4
  other v1: 13250,2028.35 13250,2071.65
A0: R18.1 R20.2 U3.3
A1: R19.1 R21.2 U3.30
"ADC CS": U1.75 U6.1
"Au In1": C54_FB1.1 R29_FB1.1
"Au In2": C54_FB2.1 R29_FB2.1
CM: C34.1 C36.2 C38.1 R10.1 R14.1 U3.7 U4_FB1.2 U4_FB2.2
D3V3: C3.2 C4.2 C5.2 C6.2 C7.2 C8.2 C9.2 C10.2 C11.2 C12.2 C14.2 C15.2 C16.2 C17.2 C18.2 C19.2 C20.2 C21.2 C22.2 C23.2 C41.2 C44.2 C62.2 C63.2 C66.2 C68.2 C70.2 R2.2 R3.2 R4.2 R5.2 R9.2 R18.2 R19.2 U1.4 U1.11 U1.17 U1.22 U1.26 U1.36 U1.41 U1.49 U1.50 U1.55 U1.62 U1.72 U1.82 U3.1 U6.2 U8.2 U8.4 U9.1 U10.3
DVDDOUT: C43.2 C47.2 U3.24
"F CS": U1.23 U7.1
HOLD: U1.24 U7.7
IN+1: C56_FB1.2 R30_FB1.2
IN+2: C56_FB2.2 R30_FB2.2
"IN+ 1": U3.10
"IN+ 2": U3.12
IN-1: C51_FB1.2 R24_FB1.2
IN-2: C51_FB2.2 R24_FB2.2
"IN- 1": U3.11
"IN- 2": U3.13
MCLK: U1.12 U3.2
MISO: U1.28 U7.2
"MISO 1": U6.9
MOSI: U1.27 U7.5
"MOSI 1": U1.78 U6.8
NetC1_2: C1.2 R8.1 Y1.1
NetC13_2: C13.2 U1.43 U3.29
NetC34_2: C34.2 R10.2 R11.1 U2.3
NetC35_1: C35.1
NetC35_2: C35.2 C37.1 R13.2 U2.1
NetC37_2: C37.2 R12.1 R13.1 U2.2
NetC38_2: C38.2 R14.2 R15.1 U2.5
NetC39_1: C39.1
NetC39_2: C39.2 C40.1 R17.2 U2.7
NetC40_2: C40.2 R16.1 R17.1 U2.6
NetC50_FB1_1: C50_FB1.1 R22_FB1.1
NetC50_FB2_1: C50_FB2.1 R22_FB2.1
NetC52_FB1_1: C52_FB1.1 C53_FB1.2 R25_FB1.1 U4_FB1.8
NetC52_FB1_2: C52_FB1.2 R23_FB1.2 R24_FB1.1 U4_FB1.5
NetC52_FB2_1: C52_FB2.1 C53_FB2.2 R25_FB2.1 U4_FB2.8
NetC52_FB2_2: C52_FB2.2 R23_FB2.2 R24_FB2.1 U4_FB2.5
NetC53_FB1_1: C53_FB1.1 R26_FB1.2 R27_FB1.1 R28_FB1.2
NetC53_FB2_1: C53_FB2.1 R26_FB2.2 R27_FB2.1 R28_FB2.2
NetC54_FB1_2: C54_FB1.2 R26_FB1.1
NetC54_FB2_2: C54_FB2.2 R26_FB2.1
NetC55_FB1_1: C55_FB1.1 R28_FB1.1 R30_FB1.1 U4_FB1.4
NetC55_FB1_2: C55_FB1.2 R27_FB1.2 U4_FB1.1
NetC55_FB2_1: C55_FB2.1 R28_FB2.1 R30_FB2.1 U4_FB2.4
NetC55_FB2_2: C55_FB2.2 R27_FB2.2 U4_FB2.1
NetC59_2: C59.2 R31.1 U6.7
NetC60_2: C60.2 R32.1 U6.6
NetC64_2: C64.2 R33.1 U6.5
NetC65_2: C65.2 R35.1 U6.4
NetD1_1: D1.1 R1.2
NetD1_2: D1.2 U1.65
NetP1_1: P1.1 U1.10
NetP1_2: P1.2 U1.9
NetP1_3: P1.3 U1.8
NetP1_4: P1.4 U1.7
NetP1_5: P1.5 U1.6
NetP1_6: P1.6 U1.5
NetP2_1: P2.1 U5.3
NetP2_2: P2.2 U5.5
NetP2_3: P2.3 U5.10
NetP2_4: P2.4 U5.12
NetR2_1: R2.1 R6.2 U1.67
NetR3_1: R3.1 R7.2 U1.66
NetR4_1: R4.1 U1.19 U3.32
NetR5_1: R5.1 U1.18 U3.31
NetR22_FB1_2: R22_FB1.2 R23_FB1.1 R25_FB1.2
NetR22_FB2_2: R22_FB2.2 R23_FB2.1 R25_FB2.2
NetR31_2: R31.2 U5.1 U5.2
NetR32_2: R32.2 U5.6 U5.7
NetR33_2: R33.2 U5.8 U5.9
NetR35_2: R35.2 U5.13 U5.14
NetU1_15: U1.15 U9.3
NetU1_42: U1.42 U3.27
NetU1_44: U1.44 U3.26
NetU1_45: U1.45 U3.28
NetU1_80: U1.80
"OUT+ 1": R11.2 U3.18
"OUT+ 2": R15.2 U3.15
"OUT- 1": R12.2 U3.17
"OUT- 2": R16.2 U3.16
RST: R9.1 SW1.1 SW1.2 U1.68
"SCLK 1": U1.88 U6.10
"SPI CLK": R34.2 U1.29 U7.6
SYS_CLKIN: C2.2 U1.57 Y1.3
SYS_XTAL: R8.2 U1.56
VCC: C67.2 C73.2 U8.3 U11.3
WP: U1.25 U7.3
pads on no net: U1.1 U1.2 U1.3 U1.13 U1.16 U1.20 U1.21 U1.31 U1.32 U1.33 U1.34 U1.35 U1.37 U1.38 U1.39 U1.40 U1.46 U1.47 U1.48 U1.52 U1.53 U1.54 U1.58 U1.59 U1.60 U1.63 U1.64 U1.69 U1.70 U1.71 U1.73 U1.74 U1.77 U1.79 U1.83 U1.84 U1.85 U1.86 U1.87 U3.4 U3.5 U3.6 U3.14 U3.19 U3.20 U3.21 U3.33 U9.4

## Text inside footprints (layer, text, board x,y; h text height)
P1: Top Overlay "1" at 14863.07,1130.28 h40 r90; Top Overlay "6" at 14863.07,1620.04 h40 r90
P2: Top Overlay "1" at 9148.07,2775.28 h40 r90; Top Overlay "6" at 9148.07,3265.04 h40 r90